# Altium PCB Sunday.PcbDoc
Units mil, origin at the board's own origin, x right, y up, seen from the top; angles counter-clockwise.
Board outline 6000 x 4000 mil, 2 copper layers (Top Layer, Bottom Layer), stack 61.756 mil thick; 18 components, 15 nets, 85 pads, 0 vias.
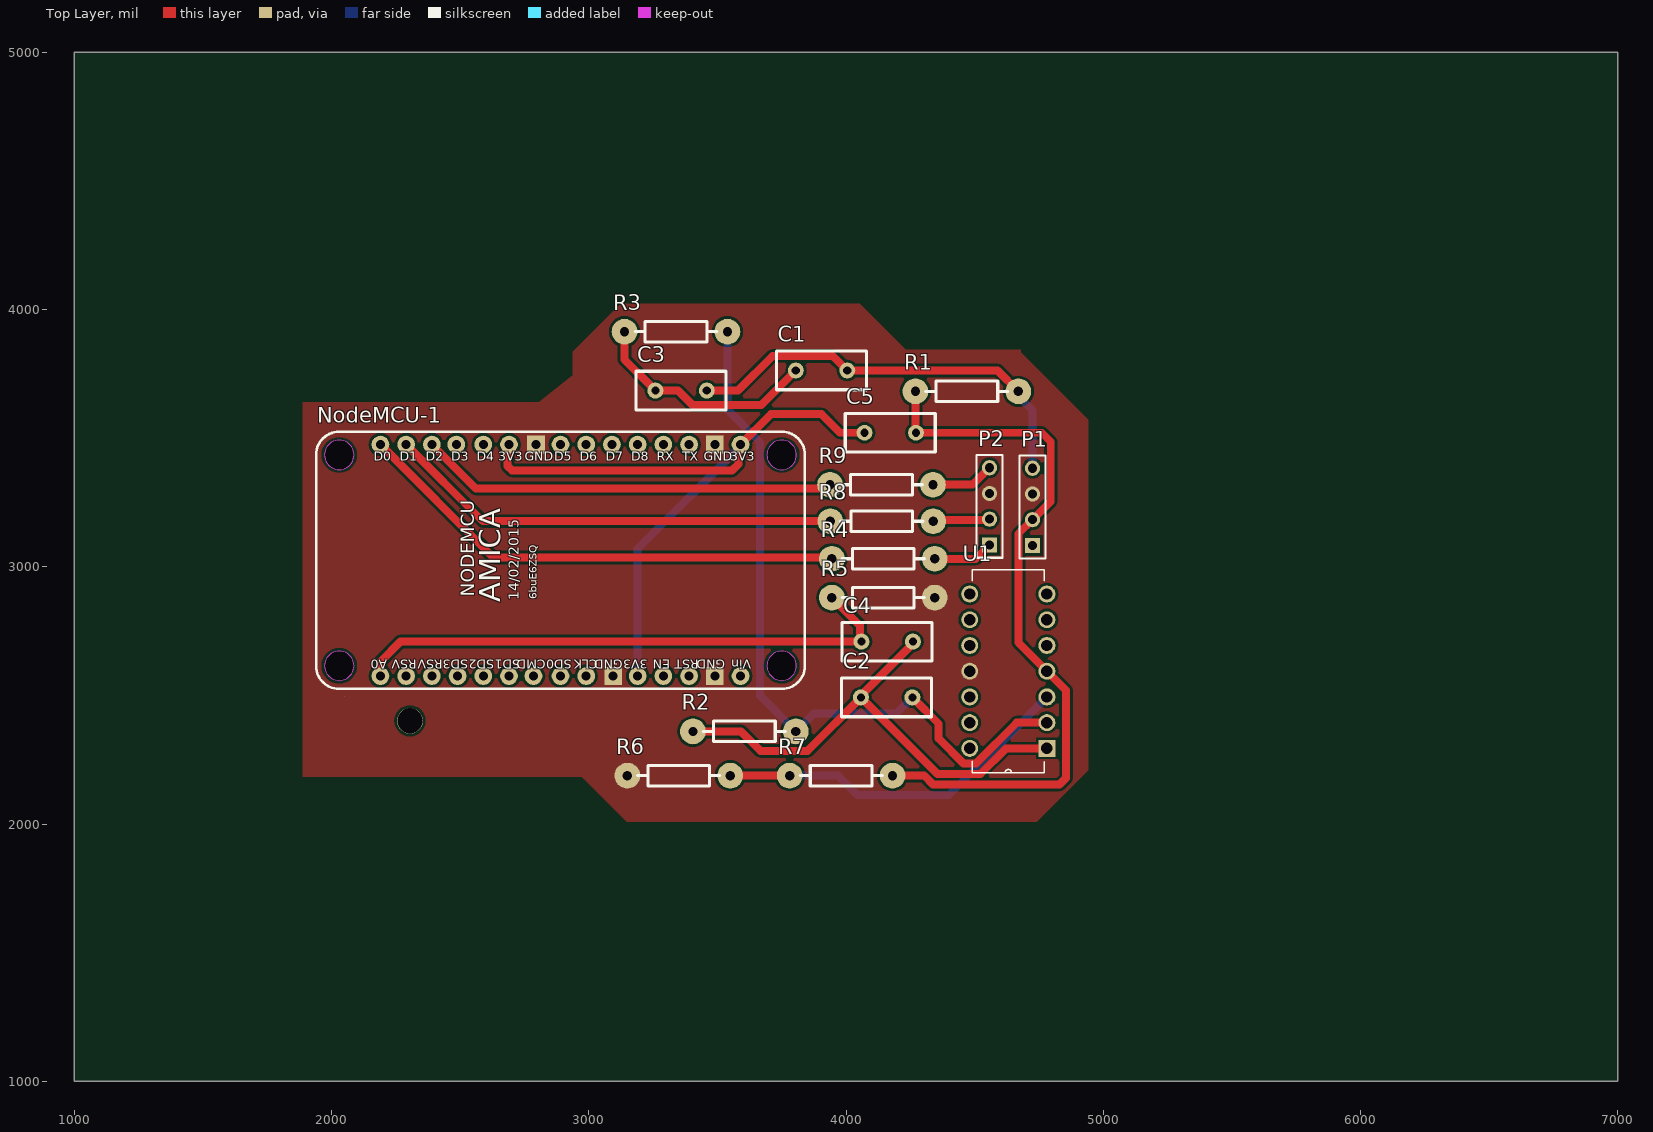
[diagram p0: Top Layer view]
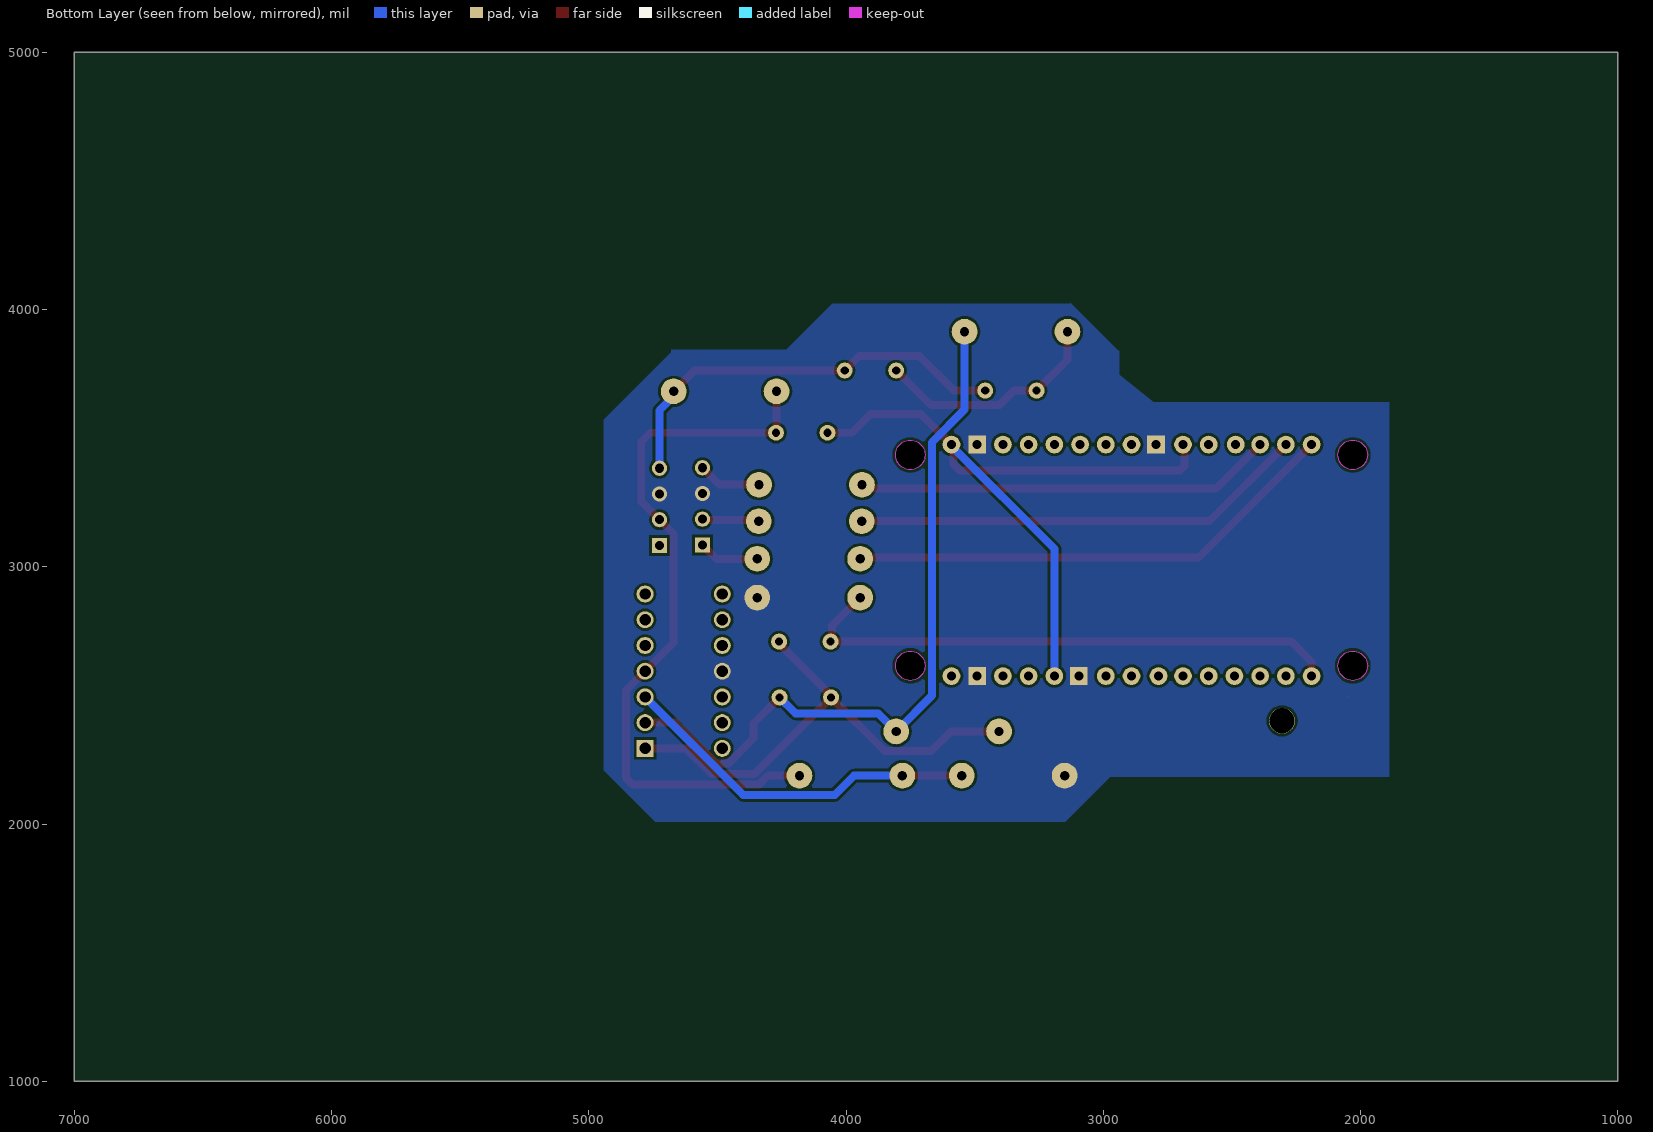
[diagram p1: Bottom Layer view, seen from below]

## Layer stack, top to bottom
Top Solder: solder mask 1, SM-001, Dk 4
Top Layer: signal copper 1.378
Dielectric 1: core 59, Core-043, Dk 4.3
Bottom Layer: signal copper 1.378
Bottom Solder: solder mask 1, SM-001, Dk 4

## Board outline
1000,1000 7000,1000 7000,5000 1000,5000
cut-out: 2051,2495

## Design rules (kind name [scope] priority, off if disabled: settings)
Clearance [All] p1: gap=10 ignorepadtopadclearanceinfootprint=FALSE except(0: Arc-Hole Track-Hole SMDPad-Hole THPad-Hole Via-Hole Fill-Hole Poly-Hole Region-Hole Text-Hole)
PolygonConnect [All] p1: connectstyle=Direct reliefconductorwidth=12 reliefentries=4 polygonreliefangle="90 Angle" airgapwidth=10
RoutingVias [All] p1: holewidth=28 width=50 viastyle="Through Hole" minholewidth=28 minwidth=50 maxholewidth=28 maxwidth=50
SolderMaskExpansion [All] p1: expansion=4 istentingtop=FALSE
Width [All] p1: maxlimit=31 minlimit=31 preferedwidth=31 minimp=50.000000 maximp=50.000000 favimp=50.000000
30 further rules are at their usual default settings.

## Classes and differential pairs
component class Sunday: C1 C3 C4 C5 NodeMCU-1 P1 P2 R1 R2 R3 R4 R7 R8 R9 U1

## Components (designator, comment, footprint, x,y, rotation, side; value= is the part's Value field where it differs from the comment)
C1 "CAP" RAD0.2 4005,3763 r180 top value=470n
C2 "CAP" RAD0.2 4258,2492 r180 top value=10p
C3 "CAP" RAD0.2 3459,3685 r180 top value=470n
C4 "CAP" RAD0.2 4260,2709 r180 top value=100n
C5 "CAP" RAD0.2 4272,3521 r180 top value=22u
NodeMCU-1 "NodeMCU V1.0 ESP-12E" "NodeMCU V1.0 ESP-12E" 1944,2524 r90 top
P1 "Micro" HDR1X4 4725,3083 r90 top
P2 "Micro" HDR1X4 4558,3085 r90 top
R1 "RES" AXIAL0.4 4670,3682 r180 top value=1K
R2 "RES" AXIAL0.4 3405,2360 r0 top value=1M
R3 "RES" AXIAL0.4 3539,3914 r180 top value=47K
R4 "RES" AXIAL0.4 4345,3031 r180 top value=220
R5 "RES" AXIAL0.4 4345,2880 r180 top value=150
R6 "RES" AXIAL0.4 3550,2188 r180 top value=10K
R7 "RES" AXIAL0.4 4181,2188 r180 top value=10K
R8 "RES" AXIAL0.4 4339,3177 r180 top value=220
R9 "RES" AXIAL0.4 4338,3319 r180 top value=220
U1 "TL084CN" DIP254P762X510-14 4481,2894 r180 top

## Footprints (in the part's own frame and the unit in brackets; to place one, negate y for a bottom-side part, rotate by r counter-clockwise, add the part's x,y. Pads: shape width x height; smd on the part's side, far side on the other; paste and mask are expansions set on the pad)
AXIAL0.4 [mil]
  round 100 hole 36: 1(0,0) 2(400,0)
  silkscreen extent 40,-40 360,40
DIP254P762X510-14 [mil]
  rect 66x66 hole 44: 1(-300,600)
  round 66 hole 44: 2(-300,500) 3(-300,400) 4(-300,300) 5(-300,200) 6(-300,100) 7(-300,0) 8(0,0) 9(0,100) 10(0,200) 11(0,300) 12(0,400) 13(0,500) 14(0,600)
  silkscreen extent -290,-94 -10,694
HDR1X4 [mm] "Connector; Header; 4 Position"
  rect 1.5x1.5 hole 0.9: 1(0,0)
  round 1.5 hole 0.9: 2(2.54,0) 3(5.08,0) 4(7.62,0)
  silkscreen extent -1.27,-1.27 8.89,1.27
"NodeMCU V1.0 ESP-12E" [mil]
  round 115 hole 115 unplated paste-300 mask-300: 0(91,-86) 0(91,-1806) 0(911,-86)
  round 69 hole 35: 3V3(51,-1246) 3V3(951,-746) 3V3(951,-1646) A0(51,-246) CLK(51,-1046) CMD(51,-841) D0(951,-246) D1(951,-346) D2(951,-446) D3(951,-541) D4(951,-646) D5(951,-946) D6(951,-1046) D7(951,-1146) D8(951,-1246) EN(51,-1346) RST(51,-1446) RSV(51,-346) RSV(51,-446) RX(951,-1346) SD0(51,-946) SD1(51,-746) SD2(51,-646) SD3(51,-546) TX(951,-1446) VIN(51,-1646)
  rect 69x69 hole 35: GND(51,-1151) GND(51,-1546) GND(951,-851) GND(951,-1546)
  oval 100x115 hole 115 unplated paste-300 mask-300: ""(911,-1806)
  Keep-Out Layer circle w2: c91,-86 r57.5
  Keep-Out Layer circle w2: c911,-86 r57.5
  Keep-Out Layer circle w2: c91,-1806 r57.5
  Keep-Out Layer circle w2: c911,-1806 r57.5
  silkscreen extent 1,-1896 1001,4
RAD0.2 [mil]
  round 62 hole 32: 1(0,0) 2(200,0)
  silkscreen extent -75,-75 275,75

## Part data
C1 C2 C3 C4 C5: "capacité non polarisée"
NodeMCU-1: "NodeMCU V1.0 ESP8266 (ESP-12E)"
P1 P2: library part "Header 4", "Header, 4-Pin", LatestRevisionDate=17-Jul-2002, LatestRevisionNote="Re-released for DXP Platform.", Publisher="Altium Limited"
R1 R2 R3 R4 R5 R6 R7 R8 R9: "resistance"
U1: "J-FET Amplifier 4 Circuit 14-DIP", Package="DIP-14 STMicroelectronics", Availability=Unavailable, MF=STMicroelectronics, MP=TL084CN, Price=None, SnapEDA_Link=https://www.snapeda.com/parts/TL084CN/STMicroelectronics/view-part/1137005/?ref=snap

## Free pads (board coordinates)
  round 100 hole 98.5: 2(2305,2401)

## Nets (pads, with @x,y where several pads share a name; then routed paths per layer and width w, separated by ;. In a path a pad name is that pad's centre, name@x,y a point inside that pad or via, vN(x,y) a via of type N, cw(c..) or ccw(c..) an arc to the next point about the centre after c; other vN are vias at no path point)
GND: NodeMCU-1.GND P1.3 P2.3 R5.1 R6.2 U1.11
NetC1_1: C1.1 C3.1 P1.4 R1.1 | length 1645.4
  Top Layer w31: C3.1 3580.65,3685 3715.15,3819.5 3948.5,3819.5 C1.1 4589,3763 R1.1
  Bottom Layer w31: R1.1 4670,3663.33 4725,3608.33 P1.4
NetC1_2: C1.2 C3.2 R3.2 | length 903.8
  Top Layer w31: R3.2 3139,3805 C3.2 3346.65,3685 3403.15,3628.5 3670.5,3628.5 C1.2
NetC2_1: C2.1 R2.2 R3.1 U1.2 | length 2900.6
  Top Layer w31: C2.1 4360.35,2389.65 4360.35,2331.92 4456.77,2235.5 4505.23,2235.5 4663.73,2394 U1.2
  Bottom Layer w31: R3.1 3539,3610.85 3666,3483.85 3666,2499 R2.2 3874.64,2429.64 4195.64,2429.64 C2.1
NetC2_2: C2.2 C4.1 R2.1 U1.1 | length 1958.3
  Top Layer w31: R2.1 3592.22,2360 3667.72,2284.5 3850.5,2284.5 C2.2 ; C4.1 4260,2701.5 4058,2499.5 C2.2 ; U1.1 4621.71,2294 4522.21,2194.5 4355.5,2194.5 C2.2
NetC4_2: C4.2 NodeMCU-1.A0 R5.2 | length 2176.9
  Top Layer w15: NodeMCU-1.A0 NodeMCU-1.A0@2191,2576
  Top Layer w31: NodeMCU-1.A0@2191,2576 2191,2632 2268,2709 C4.2 4054.07,2714.93 4054.07,2770.93 R5.2
NetC5_2: C5.2 NodeMCU-1.3V3 | length 2706.9
  Top Layer w31: NodeMCU-1.3V3@2690,3475 2684,3469 2684,3392.16 2702.16,3374 3557,3374 3582.73,3399.73 3582.73,3467.73 3590,3475 3708,3593 3905,3593 3977,3521 C5.2
  Bottom Layer w31: NodeMCU-1.3V3@3190,2575 3190,3069.94 3590,3469.94 NodeMCU-1.3V3@3590,3475
NetNodeMCU-1_D0: NodeMCU-1.D0 R4.2 | length 1942
  Top Layer w31: NodeMCU-1.D0 2629,3036 R4.2@3950.18,3036
NetNodeMCU-1_D1: NodeMCU-1.D1 R8.2 | length 1772.4
  Top Layer w31: NodeMCU-1.D1 2588,3177 R8.2
NetNodeMCU-1_D2: NodeMCU-1.D2 R9.2 | length 1657.6
  Top Layer w15: R9.2 3955,3319 R9.2@3966,3308
  Top Layer w31: NodeMCU-1.D2 2561,3304 3923,3304 R9.2
NetP2_1: P2.1 R4.1 | length 235.4
  Top Layer w31: R4.1 4504,3031 P2.1
NetP2_2: P2.2 R8.1 | length 223
  Top Layer w31: R8.1@4339.64,3177 R8.1 4343,3181 4554,3181 P2.2
NetP2_4: P2.4 R9.1 | length 247.3
  Top Layer w31: R9.1 4492,3319 P2.4
NetR6_1: R6.1 R7.2 U1.3 | length 1420.3
  Top Layer w31: R6.1 R7.2
  Bottom Layer w31: R7.2 3968.22,2188 4043.72,2112.5 4399.5,2112.5 U1.3
VCC: C5.1 P1.2 R1.2 R7.1 U1.4 | length 2835
  Top Layer w31: R7.1 4304.02,2188 4338.52,2153.5 4829.5,2153.5 4855,2179 4855,2520 U1.4 4669.97,2705.03 4669.97,3127.97 P1.2 4796,3254 4796,3486 4761,3521 C5.1 4271,3522 4271,3681 R1.2
pads on no net: NodeMCU-1. NodeMCU-1.0 NodeMCU-1.CLK NodeMCU-1.CMD NodeMCU-1.D3 NodeMCU-1.D4 NodeMCU-1.D5 NodeMCU-1.D6 NodeMCU-1.D7 NodeMCU-1.D8 NodeMCU-1.EN NodeMCU-1.RST NodeMCU-1.RSV NodeMCU-1.RX NodeMCU-1.SD0 NodeMCU-1.SD1 NodeMCU-1.SD2 NodeMCU-1.SD3 NodeMCU-1.TX NodeMCU-1.VIN P1.1 U1.5 U1.6 U1.7 U1.8 U1.9 U1.10 U1.12 U1.13 U1.14

## Polygon pours and split planes (outlines as drawn)
GND on Bottom Layer "GND_L02_P003" (solid, pour order 3): 1887.5,2184.16 1887.5,3639.84 2804.5,3639.84 2937.5,3745.75 2937.5,3840.16 2941.5,3840.16 3127.5,4026.16 3130.5,4023.16 4052.5,4023.16 4231.5,3844.16 4679.5,3844.16 4679.5,3834.16 4941.5,3572.16 4941.5,2209.15 4741.5,2009.15 3147.5,2009.15 2972.5,2184.16
no net on Bottom Layer "NONET_L02_P006" (solid, pour order 6): 2655,2404
no net on Bottom Layer "NONET_L02_P005" (solid, pour order 5): 2953,2436
no net on Bottom Layer "NONET_L02_P002" (solid, pour order 2): 5567,3080
no net on Bottom Layer "NONET_L02_P000" (solid, pour order 0): 1919,3600
GND on Top Layer "GND_L01_P004" (solid, pour order 4): 1887.5,3639.84 2805,3639.84 2938,3745.28 2938,3836.66 3127.5,4026.16 3130.5,4023.16 4052.5,4023.16 4231.65,3844 4679.5,3844 4679.5,3834.16 4941.5,3572.16 4941.5,2209.15 4741.5,2009.15 3147.5,2009.15 2972.5,2184.16 1887.5,2184.16

## Text inside footprints (layer, text, board x,y; h text height)
NodeMCU-1: Top Overlay "GND" at 3132,2650 h60 r180; Top Overlay "3V3" at 3229,2650 h60 r180; Top Overlay "EN" at 3316,2650 h60 r180; Top Overlay "RST" at 3428,2650 h60 r180; Top Overlay "GND" at 3531,2650 h60 r180; Top Overlay "Vin" at 3631,2650 h60 r180; Top Overlay "D7" at 3065.23,3400 h60; Top Overlay "D8" at 3165.11,3400 h60; Top Overlay "RX" at 3264.06,3400 h60; Top Overlay "TX" at 3363,3400 h60; Top Overlay "GND" at 3446.2,3400 h60; Top Overlay "3V3" at 3550,3400 h60; Top Overlay "D6" at 2964.12,3400 h60; Top Overlay "CMD" at 2833.14,2650 h60 r180; Top Overlay "D0" at 2164,3400 h60; Top Overlay "D1" at 2265.35,3400 h60; Top Overlay "D2" at 2365.58,3400 h60; Top Overlay "D3" at 2465.58,3400 h60; Top Overlay "D4" at 2564,3400 h60; Top Overlay "3V3" at 2649.01,3400 h60; Top Overlay "GND" at 2751,3400 h60; Top Overlay "D5" at 2865,3400 h60; Top Overlay "A0" at 2217,2650 h60 r180; Top Overlay "RSV" at 2331,2650 h60 r180; Top Overlay "RSV" at 2431.43,2650 h60 r180; Top Overlay "SD3" at 2531.86,2650 h60 r180; Top Overlay "SD2" at 2632.29,2650 h60 r180; Top Overlay "SD1" at 2732.71,2650 h60 r180; Top Overlay "SD0" at 2933.57,2650 h60 r180; Top Overlay "CLK" at 3034,2650 h60 r180; Top Overlay "6buE6ZSQ" at 2797,2873 h30 r90; Top Overlay "NODEMCU" at 2573,2884 h90 r90; Top Overlay "AMICA" at 2683,2863 h140 r90; Top Overlay "14/02/2015" at 2742,2869 h69 r90